# Altium PCB fullflex-2-save.PcbDoc
Units mm, origin at the board's own origin, x right, y up, seen from the top; angles counter-clockwise.
Board outline 23.88 x 31.13 mm, 4 copper layers (CuNiAu Pads, metal3, metal2, metal1), stack 0.638 mm thick; 52 components, 23 nets, 175 pads, 139 vias.
Unrouted connection lines stored in the file: 7.
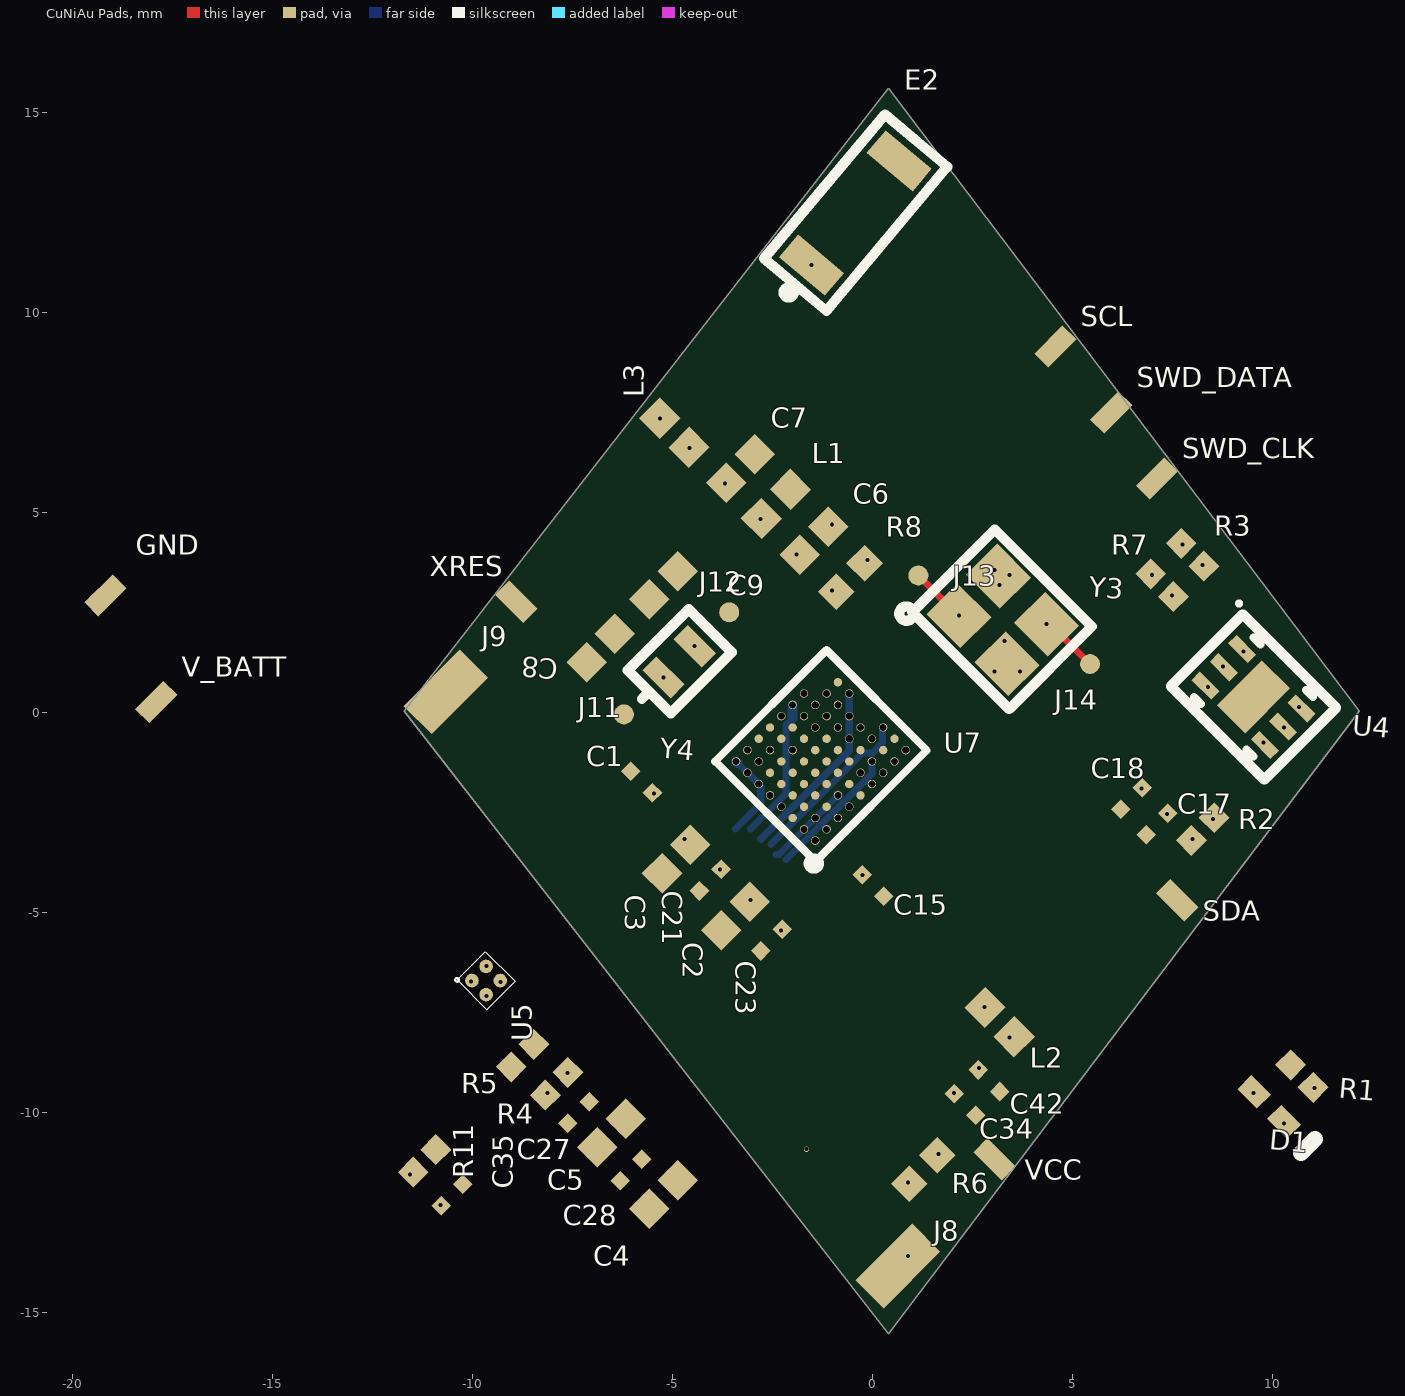
[diagram p0: CuNiAu Pads view]
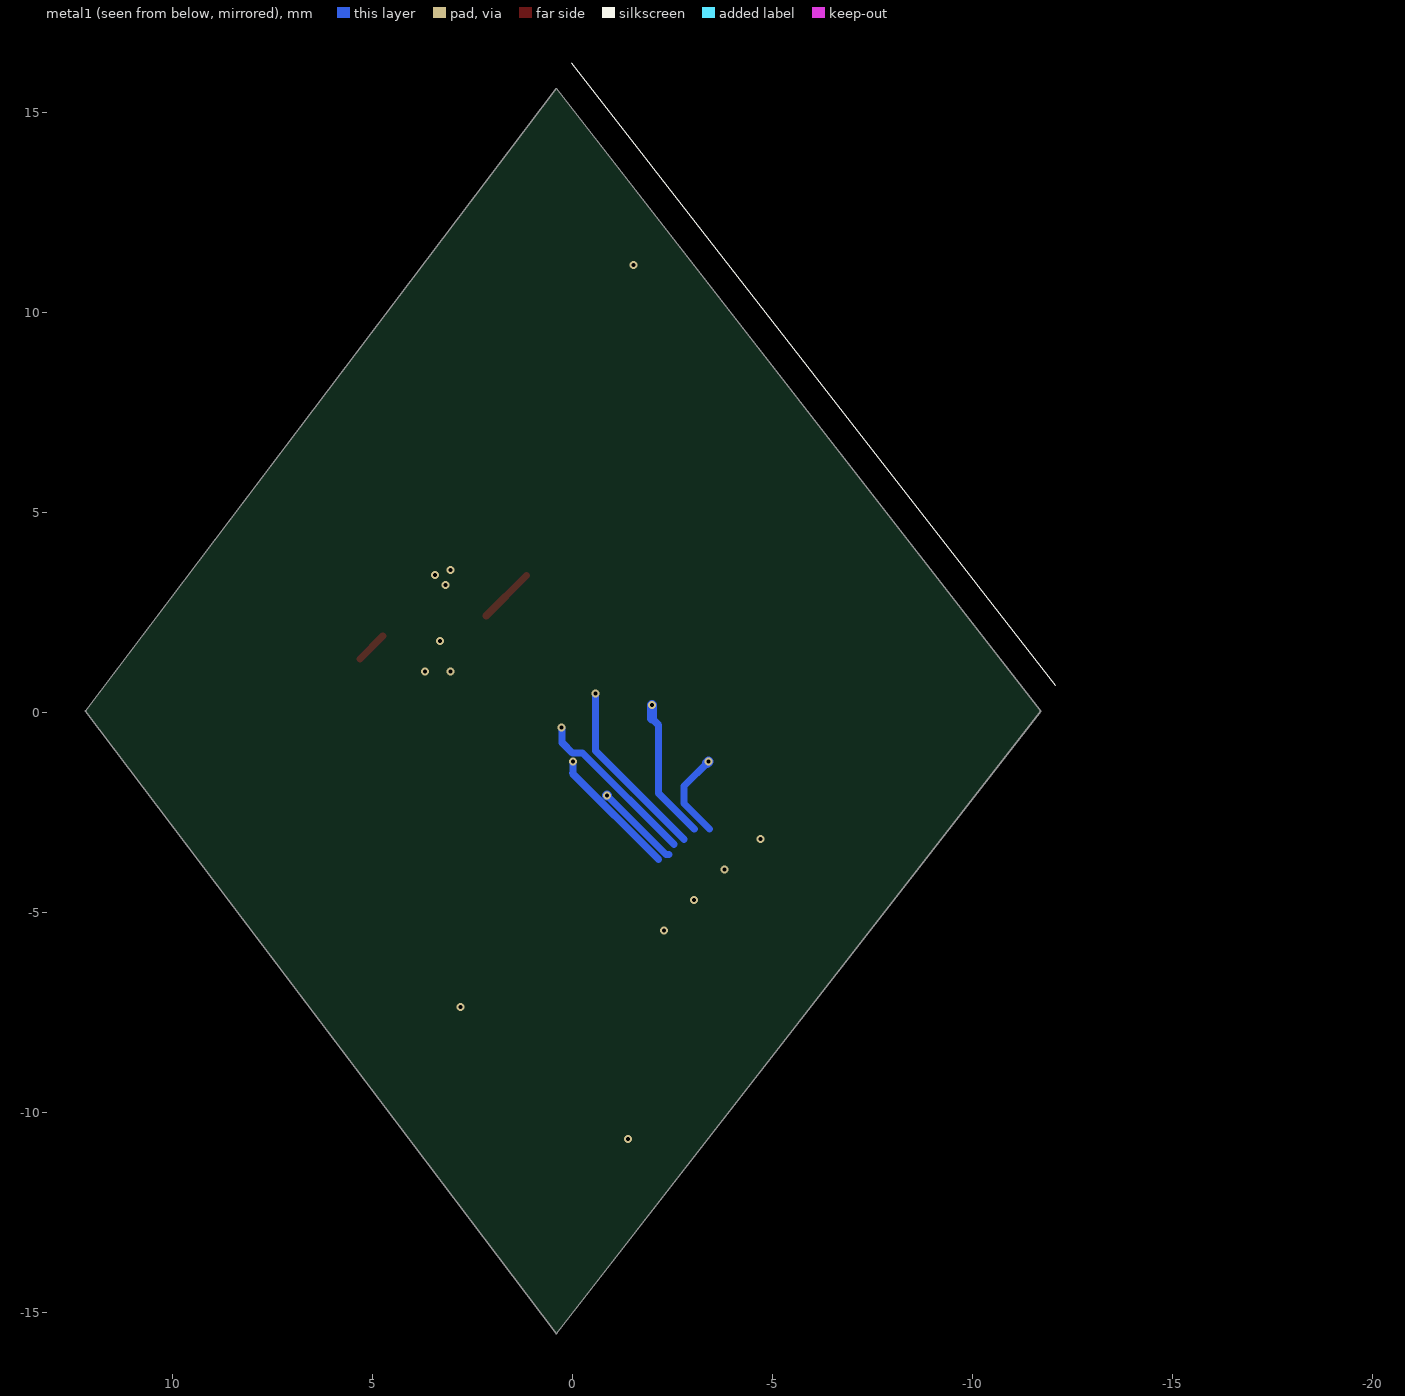
[diagram p1: metal1 view, seen from below]
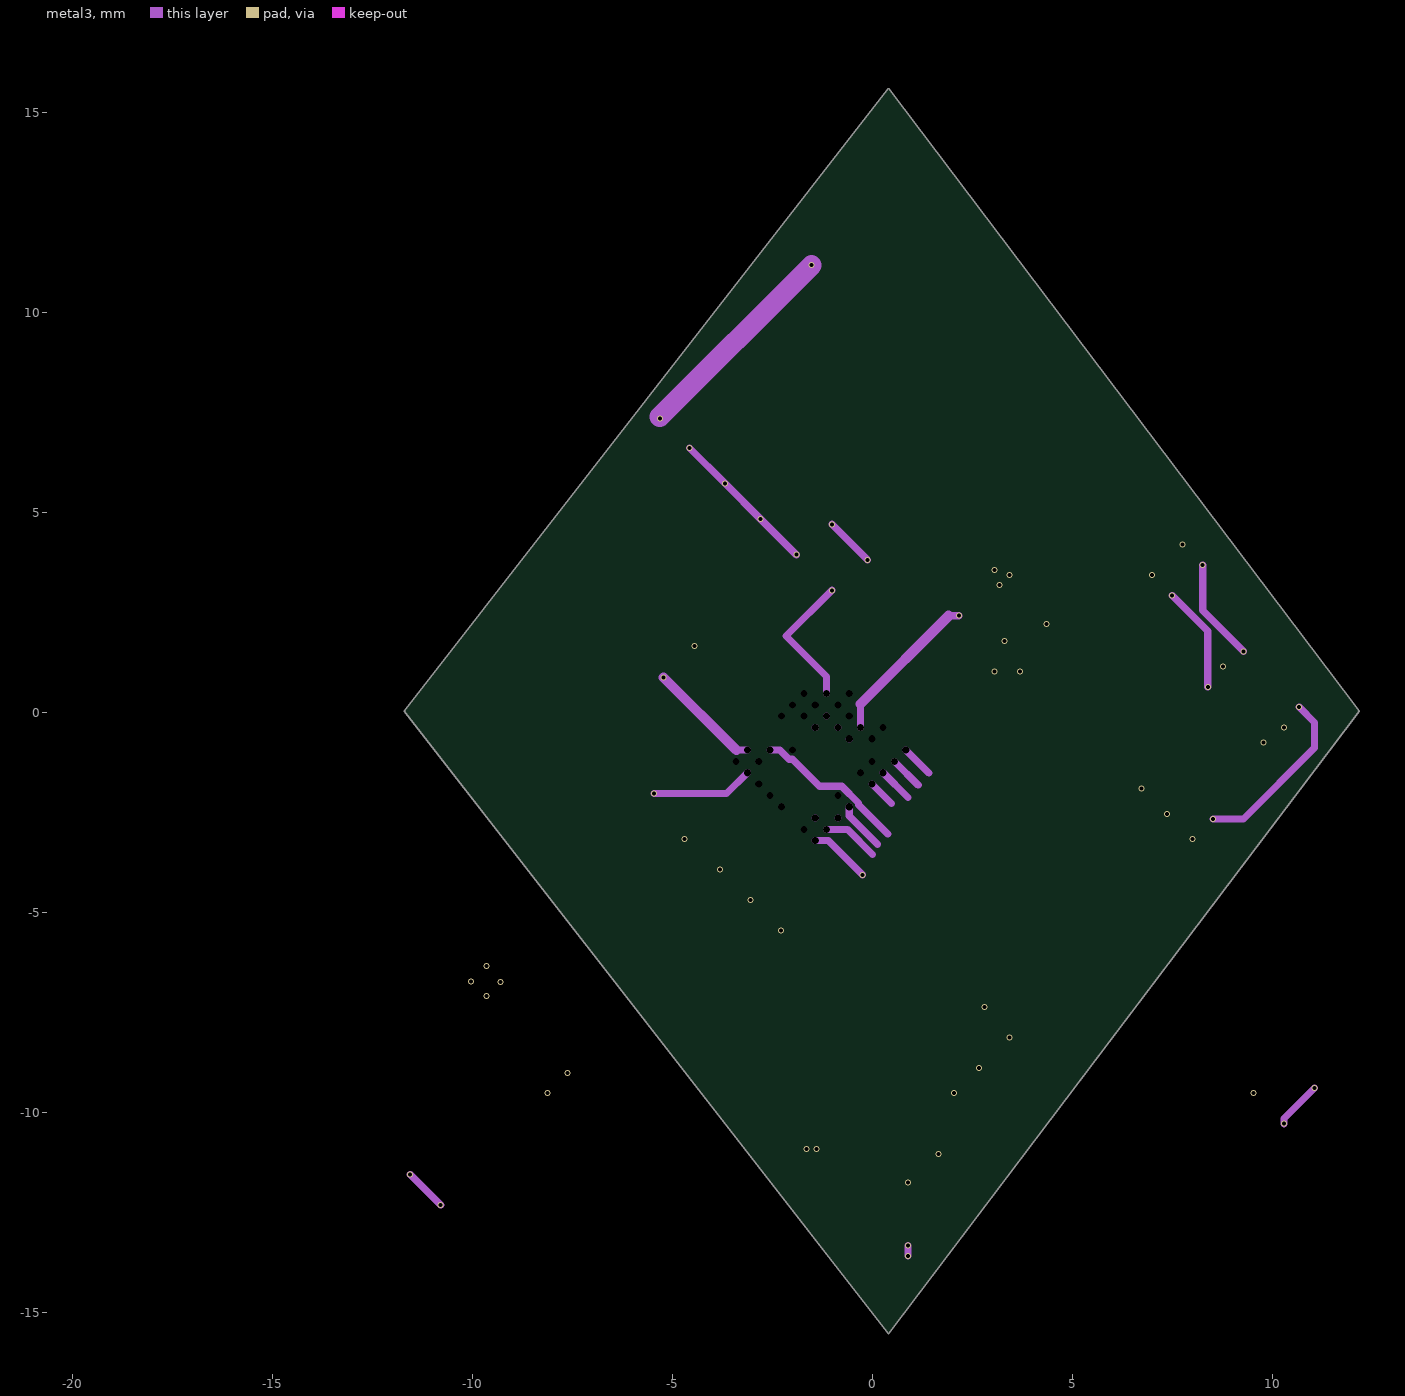
[diagram p2: metal3]
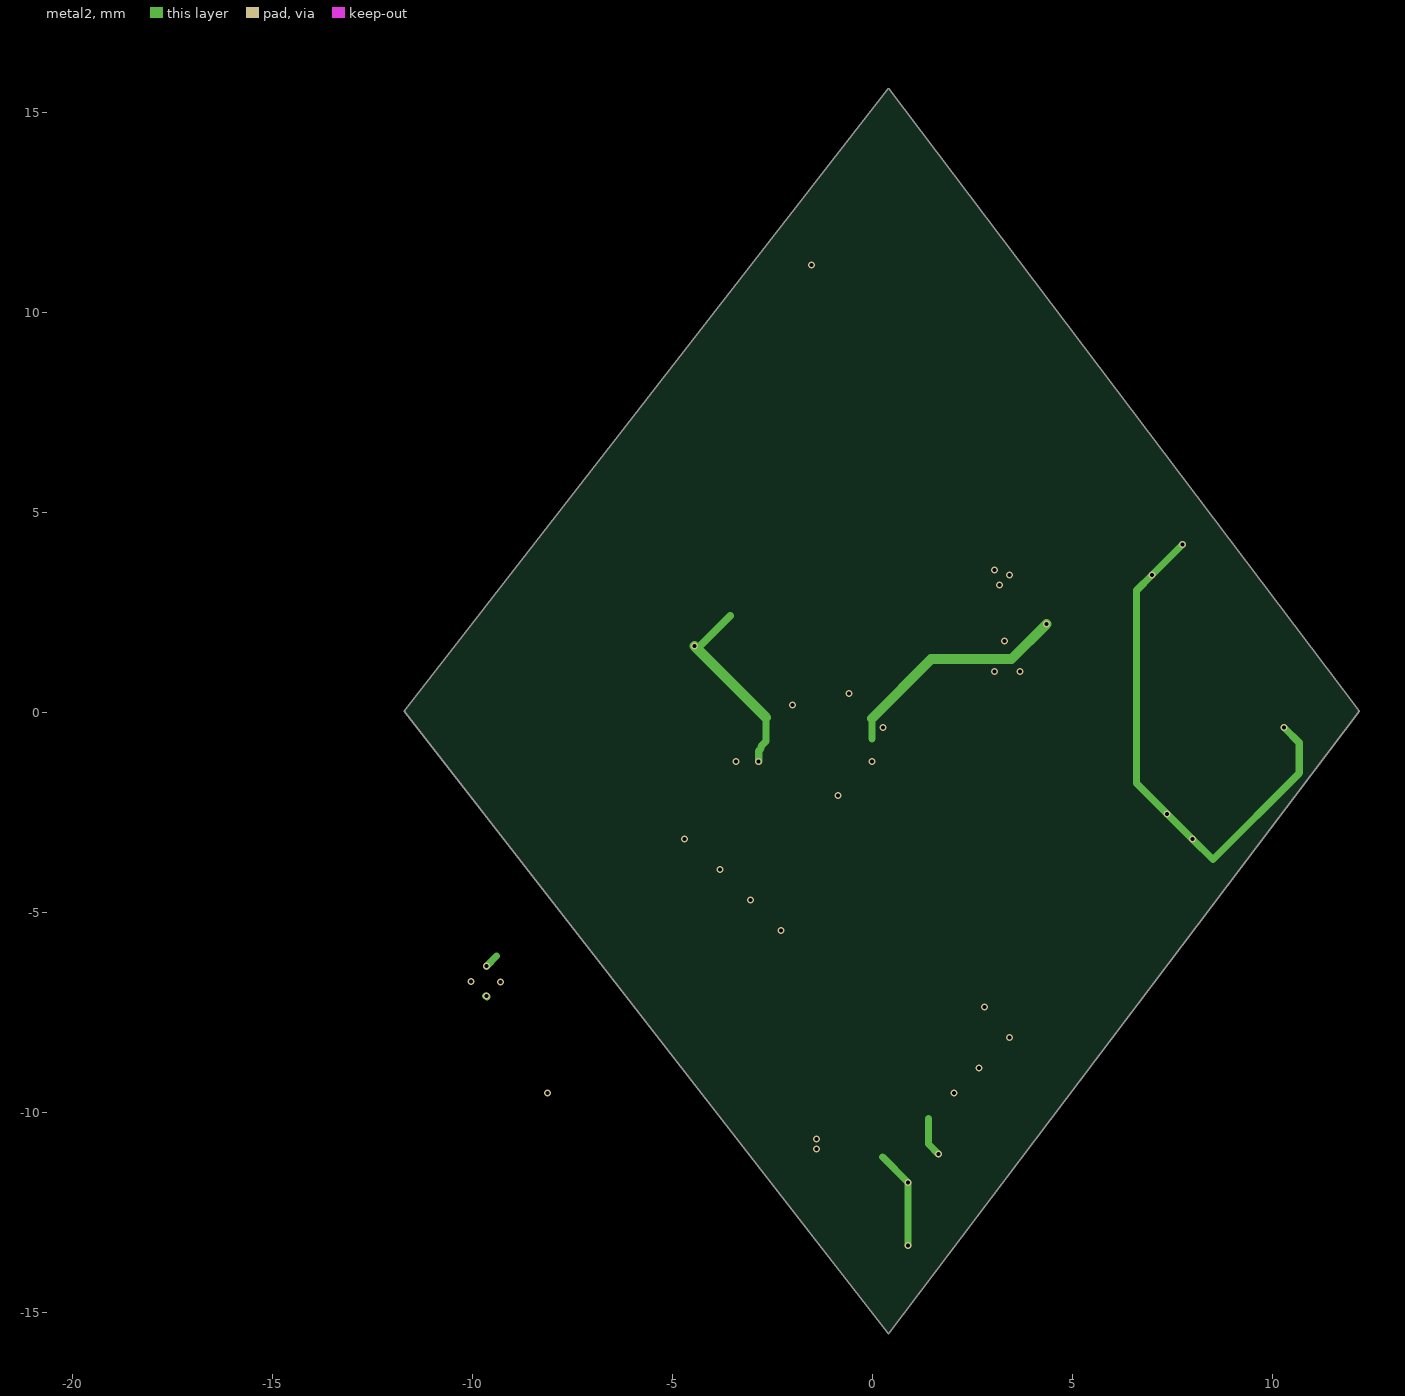
[diagram p3: metal2]

## Layer stack, top to bottom
pad expose: solder mask 0.0102, Solder Resist, Dk 3.5
CuNiAu Pads: signal copper 0.0009
pi4: core 0.254, polyimide, Dk 3.5
metal3: signal copper 0.0008
pi3: core 0.254, polyimide, Dk 3.5
metal2: signal copper 0.0008
pi2: prepreg 0.127, poylimide, Dk 3.5
metal1: signal copper 0.0008
pi1: solder mask 0.0102, Solder Resist, Dk 3.5

## Board outline
0.393,-15.532 ccw(c0.399,-15.528) 0.404,-15.532 ccw(c0.399,-15.528) 0.404,-15.532 12.171,0.024 ccw(c12.166,0.028) 12.171,0.024 ccw(c12.166,0.028) 12.172,0.028 ccw(c12.166,0.028) 12.171,0.032 12.171,0.033 cw(c12.166,0.028) 12.171,0.032 12.171,0.033 0.404,15.589 ccw(c0.399,15.585) 0.393,15.589 -11.71,0.033 ccw(c-11.704,0.028) -11.71,0.024

## Design rules (kind name [scope] priority, off if disabled: settings)
Clearance Clearance_1 [All] p1: gap=0.051 ignorepadtopadclearanceinfootprint=TRUE
Clearance bga [WithinRoom('BGA')] p2: gap=0.474 ignorepadtopadclearanceinfootprint=TRUE
ComponentClearance ComponentClearance_1 [InComponentClass('Top Side Components') vs InComponentClass('Top Side Components')] p1: gap=0.474 collisioncheckmode=3 verticalgap=0.254 showdistances=FALSE
ComponentClearance [HasFootprint('BATTERY_PAD') vs HasFootprint('POGO-PIN-PAD')] p2: gap=0 collisioncheckmode=3 verticalgap=2540 showdistances=FALSE
ComponentClearance pogoPadClearance [HasFootprint('POGO-PIN-PAD')] p3: gap=0 collisioncheckmode=3 verticalgap=0.254 showdistances=FALSE
DiffPairsRouting [All] p1: maxlimit=0.254 minlimit=0.08 mostfreqgap=0.1 toplayer_minwidth=0.178 toplayer_maxwidth=0.381 toplayer_prefwidth=0.381 midlayer1_minwidth=0.178 midlayer1_maxwidth=0.381 midlayer1_prefwidth=0.381 midlayer2_minwidth=0.178 midlayer2_maxwidth=0.381 midlayer2_prefwidth=0.381 bottomlayer_minwidth=0.178 bottomlayer_maxwidth=0.381 bottomlayer_prefwidth=0.381 maxuncoupledlength=12.7
FanoutControl Fanout_BGA [IsBGA] p1: bgadir=Out bgaviamode=Closest fanoutstyle=BGA fanoutdirection=OutOnly viagrid=0.025 // Fanout_BGA (Default Rule)
FanoutControl Fanout_Default [All] p5: bgadir=Out bgaviamode=Centered fanoutstyle=BGA fanoutdirection=Alternating viagrid=0.025 // Fanout_Default (Default Rule)
HoleSize [All] p1: absolutevalues=TRUE maxlimit=0.54 minlimit=0.025 maxpercent=80.000 minpercent=20.000
MatchedLengths MatchLengths_xSignals_U7_Y3,Y4 [InxSignalClass('xSignals_U7_Y3,Y4_MatchLengthsClass')] p1: tolerance=2.54 checknetsindiffpair=FALSE checkdiffpairvsdiffpair=TRUE checkxsignals=TRUE checkothers=TRUE
MatchedLengths [All] p2: tolerance=25.4 checknetsindiffpair=TRUE checkdiffpairvsdiffpair=FALSE checkxsignals=FALSE checkothers=FALSE
MinimumAnnularRing [All] p1: minimumring=0
ParallelSegment [All] p1: limit=254 gap=0.254
PolygonConnect [All] p1: connectstyle=Relief reliefconductorwidth=0.254 reliefentries=4 polygonreliefangle="90 Angle" airgapwidth=0.254
RoutingLayers [All] p1: top layer_v5=FALSE mid layer 1_v5=TRUE mid layer 2_v5=TRUE bottom layer_v5=TRUE
RoutingVias [All] p1 off: holewidth=0.135 width=0.136 viastyle="Through Hole" minholewidth=0.135 minwidth=0.136 maxholewidth=0.19 maxwidth=0.201
SMDNeckDown [All] p1: percent=50.000
SolderMaskExpansion [All] p1: expansion=-0.05
ViasUnderSMD [All] p1: allowed=TRUE
Width [All] p1: maxlimit=2.5 minlimit=0.178 preferedwidth=0.203 toplayer_maxwidth=0.229 midlayer2_maxwidth=0.5 bottomlayer_maxwidth=0.5 minimp=50.000000 maximp=50.000000 favimp=50.000000 checkconnectedcopper=TRUE
24 further rules are at their usual default settings.

## Classes and differential pairs
differential pair XTAL_HF: +XTAL_HF_P -XTAL_HF_N
differential pair XTAL_LF: +XTAL_LF_P -XTAL_LF_N

## Components (designator, comment, footprint, x,y, rotation, side; value= is the part's Value field where it differs from the comment)
C1 "Capacitance" CAP_0201(0603)_M -5.771,-1.746 r135 top
C2 "Capacitance" CAP_0402(1005)_M -3.423,-5.092 r225 top
C3 "Capacitance" CAP_0402(1005)_M -4.909,-3.669 r225 top
C4 "Capacitance" CAP_0402(1005)_M -5.228,-12.057 r45 top
C5 "Capacitance" CAP_0402(1005)_M -6.524,-10.519 r45 top
C6 "Capacitance" CAP_0402(1005)_M -1.464,4.287 r225 top
C7 "Capacitance" CAP_0402(1005)_M -3.302,6.096 r45 top
C8 "Capacitance" CAP_0402(1005)_M -6.796,1.608 r225 top
C9 "Capacitance" CAP_0402(1005)_M -5.226,3.173 r45 top
C15 "Capacitance" CAP_0201(0603)_M 0.015,-4.333 r315 top
C17 "Capacitance" CAP_0201(0603)_M 7.112,-2.794 r225 top
C18 "Capacitance" CAP_0201(0603)_M 6.477,-2.159 r225 top
C21 "Capacitance" CAP_0201(0603)_M -4.056,-4.2 r225 top
C23 "Capacitance" CAP_0201(0603)_M -2.525,-5.7 r225 top
C27 "Capacitance" CAP_0201(0603)_M -7.348,-10.007 r45 top
C28 "Capacitance" CAP_0201(0603)_M -6.039,-11.44 r45 top
C34 "Capacitance" CAP_0201(0603)_M 2.313,-9.803 r315 top
C35 "Capacitance" CAP_0201(0603)_M -10.508,-12.073 r45 top
C42 "Capacitance" CAP_0201(0603)_M 2.914,-9.213 r315 top
D1 "#NAME?" LED_0402(1005) 9.9,-9.85 r315 top
E2 "2450AT18B100" 2450AT18B100 -1.524,11.176 r50 top
GND "*" POGO-PIN-PAD -19.177,2.921 r315 top
J8 "*" BATTERY_PAD 0.635,-13.843 r90 top
J9 "*" BATTERY_PAD -10.668,0.508 r90 top
J11 "*" POGO-CLOCK-PAD -6.215,-0.055 r90 top
J12 "*" POGO-CLOCK-PAD -3.582,2.498 r90 top
J13 "*" POGO-CLOCK-PAD 1.146,3.419 r90 top
J14 "*" POGO-CLOCK-PAD 5.438,1.205 r90 top
L1 "Inductance" IND_0402(1005)_M -2.413,5.207 r225 top
L2 "Inductance" IND_0402(1005)_M 3.175,-7.747 r135 top
L3 "Inductance" IND_0402(1005)_M -4.953,6.985 r135 top
R1 "Resistance" RES_0201(0603)_M 10.733,-9.098 r135 top
R2 "Resistance" RES_0201(0603)_M 8.255,-2.921 r45 top
R3 "Resistance" RES_0201(0603)_M 8.001,3.937 r315 top
R4 "Resistance" RES_0201(0603)_M -7.896,-9.288 r45 top
R5 "Resistance" RES_0201(0603)_M -8.748,-8.585 r225 top
R6 "Resistance" RES_0402(1005)_M 1.27,-11.43 r45 top
R7 "Resistance" RES_0201(0603)_M 7.239,3.175 r135 top
R8 "Resistance" RES_0402(1005)_M -0.554,3.368 r45 top
R11 "Resistance" RES_0201(0603)_M -11.199,-11.216 r225 top
SCL "*" POGO-PIN-PAD 4.572,9.144 r315 top
SDA "*" POGO-PIN-PAD 7.62,-4.699 r225 top
SWD_CLK "*" POGO-PIN-PAD 7.112,5.842 r315 top
SWD_DATA "*" POGO-PIN-PAD 5.969,7.493 r315 top
U4 "*" WSON-6 9.525,0.381 r315 top
U5 "ADP172" ADP172 -9.66,-6.708 r45 top
U7 "*" WLCSP-68 -1.289,-1.089 r135 top
V_BATT "*" POGO-PIN-PAD -17.907,0.254 r315 top
VCC "*" POGO-PIN-PAD 3.048,-11.176 r225 top
XRES "*" POGO-PIN-PAD -8.905,2.759 r45 top
Y3 "ECX-2236" ECX-2236 2.159,2.413 r315 top
Y4 "32.768KHz" ABS05 -5.224,0.872 r45 top

## Footprints (in the part's own frame and the unit in brackets; to place one, negate y for a bottom-side part, rotate by r counter-clockwise, add the part's x,y. Pads: shape width x height; smd on the part's side, far side on the other; paste and mask are expansions set on the pad)
2450AT18B100 [mm] "2.4GHz Mini Antenna SMD, 50 ohm Resistence"
  rect 0.74x1.5 smd mask+0.03: 1(0,0) 2(3.406,0)
  silkscreen extent -1.02,-1.02 4.06,1.02, body extent -0.05,-0.9 3.35,0.9, height 1.4
ABS05 [mm] "32.768 kHz CRYSTAL 12.5 PF +/-20ppm"
  rect 0.5x1 smd mask+0.1: 1(0,0) 2(1.102,0)
  silkscreen extent -0.76,-0.76 1.65,0.76, body extent -0.25,-0.5 1.35,0.5, height 0.5
ADP172 [mm] "4-Ball WLCSP, CB-4-4"
  round 0.34 smd paste+0.01 mask+0.01: A1(-0.25,0.25) A2(0.25,0.25) B1(-0.25,-0.25) B2(0.25,-0.25)
  silkscreen extent -0.55,-0.53 0.5,0.57, body extent -0.48,-0.48 0.48,0.48, height 0.69
BATTERY_PAD [mm]
  rect 1x2 smd rot 45: 1(0,0)
CAP_0201(0603)_M [mm] "Chip Capacitor, Body 0.6x0.3mm, Height 0.33mm, IPC Low Density"
  rect 0.35x0.35 smd mask+0: 1(-0.381,0) 2(0.381,0)
  body extent -0.31,-0.17 0.32,0.16, height 0.33
CAP_0402(1005)_M [mm] "Chip Capacitor, Body 1.0x0.5mm, Height 0.6mm, IPC Low Density"
  rect 0.72x0.72 smd: 1(-0.5,0) 2(0.5,0)
  body extent -0.55,-0.3 0.55,0.3, height 0.6
ECX-2236 [mm] "48 MHz CRYSTAL 2.5X2.0mm"
  rect 1.2x1.1 smd mask+0.05: 1(0,0) 2(1.7,0) 4(0,1.4)
  rect 1.2x1.1 smd paste+0 mask+0.05: 3(1.7,1.4)
  silkscreen extent -1.14,-1.07 2.54,2.16, body extent -0.36,-0.24 2.14,1.76, height 0.8
IND_0402(1005)_M [mm] "Chip Inductor, 2-Leads, Body 1.1x0.6mm, IPC Low Density"
  rect 0.73x0.74 smd: 1(-0.515,0) 2(0.515,0)
  body extent -0.55,-0.3 0.55,0.3, height 0.45
LED_0402(1005) [mm] "SMD, 2-Leads, Body 1x0.5mm"
  rect 0.7x0.5 smd: A(-0.508,0) K(0.55,0)
  silkscreen extent 1.4,-0.25 1.4,0.25, body extent -0.5,-0.25 0.5,0.25, height 0.6
POGO-CLOCK-PAD [mm]
  round 0.5 smd: 1(0,0)
POGO-PIN-PAD [mm]
  rect 0.5x1 smd: 1(0,0)
RES_0201(0603)_M [mm] "Chip Resistor, Body 0.6x0.3mm, IPC Low Density"
  rect 0.55x0.55 smd: 1(-0.4,0) 2(0.4,0)
  body extent -0.31,-0.16 0.31,0.16, height 0.3
RES_0402(1005)_M [mm] "Chip Resistor, 2-Leads, Body 1.05x0.55mm, IPC Low Density"
  rect 0.65x0.65 smd: 1(-0.5,0) 2(0.5,0)
  body extent -0.53,-0.28 0.53,0.28, height 0.4
WLCSP-68 [mm] "PSOC 4 BLE CY8C4247FNI-BL483 N40P8X9_352X391X55"
  round 0.21 smd mask+0: A1(-1.4,1.6) A2(-1,1.6) A3(-0.6,1.6) A4(-0.2,1.6) A5(0.2,1.6) A6(0.6,1.6) A7(1,1.6) A8(1.4,1.6) B1(-1.4,1.2) B2(-1,1.2) B3(-0.6,1.2) B4(-0.2,1.2) B5(0.2,1.2) B6(0.6,1.2) B7(1,1.2) B8(1.4,1.2) C1(-1.4,0.8) C2(-1,0.8) C3(-0.6,0.8) C4(-0.2,0.8) C5(0.2,0.8) C6(0.6,0.8) C7(1,0.8) C8(1.4,0.8) D1(-1.4,0.4) D2(-1,0.4) D3(-0.6,0.4) D4(-0.2,0.4) D5(0.2,0.4) D6(0.6,0.4) D7(1,0.4) D8(1.4,0.4) E1(-1.4,0) E2(-1,0) E3(-0.6,0) E4(-0.2,0) E5(0.2,0) E6(0.6,0) E7(1,0) E8(1.4,0) F1(-1.4,-0.4) F2(-1,-0.4) F3(-0.6,-0.4) F4(-0.2,-0.4) F5(0.2,-0.4) F6(0.6,-0.4) F7(1,-0.4) F8(1.4,-0.4) G1(-1.4,-0.8) G2(-1,-0.8) G3(-0.6,-0.8) G4(-0.2,-0.8) G5(0.2,-0.8) G6(0.6,-0.8) G7(1,-0.8) G8(1.4,-0.8) H1(-1.4,-1.2) H2(-1,-1.2) H3(-0.6,-1.2) H4(-0.2,-1.2) H5(0.2,-1.2) H6(0.6,-1.2) H7(1,-1.2) J1(-1.4,-1.6) J2(-1,-1.6) J3(-0.6,-1.6) J6(0.6,-1.6) J7(1,-1.6)
  silkscreen extent -1.9,-1.97 1.77,2.16, body extent -1.77,-1.97 1.77,1.97, height 0.55
WSON-6 [mm] "SON, 6-Leads, Body 2x2mm, Pitch 0.65mm, Thermal Pad 1X1.6mm"
  rect 0.7x0.3 smd: 1(-1.05,0.65) 2(-1.05,0) 3(-1.05,-0.65) 4(1.05,-0.65) 5(1.05,0) 6(1.05,0.65)
  rect 1x1.6 smd: 7(0,0)
  silkscreen extent -1.95,-1.27 1.65,1.45, body extent -1,-1 1,1, height 0.8

## Part data
C1 C15 C17 C18 C21 C23 C27 C28 C34 C35 C42: library part C-0201(0603), "___ OHM ___ mW 0201(0603) SMD"
C2 C3 C4 C5 C6 C7 C8 C9: library part C-0402(1005), "___ OHM ___ mW 0402(1005) SMD"
D1: library part LED_0402(1005), "LED, 0402(1005) SMD"
E2: "2.4 GHz BLE Antenna"
GND SCL SDA SWD_CLK SWD_DATA V_BATT VCC XRES: library part "Probe-Pin Pad"
J8 J9: library part Battery_Connector
J11 J12 J13 J14: library part Probe-CLOCK
L1 L3: library part I-0402(1005)
L2: library part "Inductor Iron", "Magnetic-Core Inductor"
R1 R2 R3 R4 R5 R7 R11: library part R-0201(0603), "___ OHM ___ mW 0201(0603) SMD"
R6 R8: library part R-0402(1005), "___ OHM ___ mW 0402(1005) SMD"
U4: library part TMP116, "TI Digital I2C Temperature Sensor"
U5: "3V LDO"
U7: library part CY8C4127FNI-BL483, "PSOC 4 CYBLE"
Y3: "24 MHz Crystal"
Y4: library part ABS05, "Crystal Oscillator"

## Free pads (board coordinates)
  round 0 all layers, no hole paste+0 mask+0: 1(-6.215,-0.055) 1(-5.224,0.872) 1(-5.224,0.872) 1(-4.445,1.651) 1(-4.445,1.651) 1(-4.445,1.651) 1(-3.429,-0.127) 1(-3.232,0.07) 1(2.159,2.413) 1(4.351,2.201)

## Via types
v1: diameter 0.136/0.15 (per signal layer), hole 0.1, CuNiAu Pads to metal3, 51 vias
v2: diameter 0.136/0.15 (per signal layer), hole 0.178, CuNiAu Pads to metal3, 38 vias
v3: diameter 0.15/0.175 (per signal layer), hole 0.1, metal3 to metal2, 31 vias
v4: diameter 0.175/0.2 (per signal layer), hole 0.1, metal2 to metal1, 12 vias
v5: diameter 0.136/0.15/0.175/0.2 (per signal layer), hole 0.1, CuNiAu Pads to metal1, 7 vias

## Nets (pads, with @x,y where several pads share a name; then routed paths per layer and width w, separated by ;. In a path a pad name is that pad's centre, name@x,y a point inside that pad or via, vN(x,y) a via of type N, cw(c..) or ccw(c..) an arc to the next point about the centre after c; other vN are vias at no path point)
ALERT: R7.1 U4.3 U7.B1 | length 4.1
  metal3 w0.178: v2(-1.148,-2.927) -0.629,-2.927 0,-3.556 ; v1(7.493,2.921) 8.382,2.032 v1(8.382,0.635)
ANTENNA: R8.1 U7.H7 | length 3.5
  metal3 w0.178: v2(-1.148,0.467) -1.148,0.894 -2.159,1.905 v1(-1.016,3.048)
BATTERY_LEVEL: R4.2 R5.1 U7.A4
  other v1: -7.62,-9.017
  other v2: -2.279,-2.362
GND: C1.2 C2.2 C3.2 C4.2 C5.2 C7.2 C8.2 C9.2 C15.2 C17.2 C18.2 C21.2 C23.2 C27.2 C28.2 C34.2 C35.2 C42.2 GND.1 J9.1 L1.1 R1.2 R5.2 U4.2 U4.4 U4.7 U5.B2 U7.A2 U7.A5 U7.A6 U7.B2 U7.C1 U7.D6 U7.E8 U7.F1 U7.F6 U7.F7 U7.G4 U7.G5 U7.G6 U7.G7 U7.G8 U7.H5 U7.H6 Y3.2 Y3.4 | length 0.7
  metal3 w0.178: v2(-0.016,-1.796) 0.474,-2.286
  other v1: -9.301,-6.743 9.779,-0.762 8.763,1.143
  other v2: -1.713,-2.927 -1.43,-2.645 -0.865,-2.645 -2.562,-2.079 -2.845,-1.796 -1.996,-0.948 -0.582,-0.665 -1.43,-0.382 -0.865,-0.382 -2.279,-0.099 -1.713,-0.099 -1.148,-0.099 -0.582,-0.099 -1.43,0.184 -0.865,0.184 -1.713,0.467
  other v3: -9.301,-6.743
  other v5: 3.048,1.016 3.683,1.016 3.302,1.778 3.175,3.175 3.429,3.429 3.048,3.556
LED_RED: D1.A U7.D1 | length 1.2
  metal3 w0.178: v2(-0.582,-2.362) -0.582,-2.593 0.127,-3.302
  other v1: 9.525,-9.525
NetC6_1: C6.1 R8.2 | length 1.3
  metal3 w0.178: v1(-1.016,4.699) v1(-0.127,3.81)
NetC6_2: C6.2 C7.1 L1.2 L3.1 | length 3.8
  metal3 w0.178: v1(-4.572,6.604) v1(-3.683,5.715) v1(-2.794,4.826) v1(-1.905,3.937)
NetC34_1: C34.1 C42.1 L2.1 R6.2 U5.A2 | length 1.4
  metal2 w0.178: v3(-9.652,-6.35) -9.398,-6.096 ; 1.397,-10.16 1.397,-10.795 v1(1.651,-11.049)
  other v1: 2.032,-9.525 2.667,-8.89 3.429,-8.128 -9.652,-6.35
  other v3: 1.651,-11.049 2.032,-9.525 2.667,-8.89 3.429,-8.128
NetD1_K: D1.K R1.1 | length 1.2
  metal3 w0.178: v1(10.287,-10.287) 10.287,-10.16 v1(11.049,-9.398)
NetE2_1: E2.1 L3.2 | length 5.4
  metal3 w0.178: v1(-5.317,7.349) v1@-5.317,7.383
  metal3 w0.508: v1@-5.317,7.383 v5(-1.524,11.176)
SCL: R3.2 SCL.1 U4.1 U7.H1 | length 3.4
  metal3 w0.178: v2(0.549,-1.23) 1.143,-1.824 ; v1(8.255,3.683) 8.255,2.54 v1(9.271,1.524)
SDA: R2.2 SDA.1 U4.6 U7.J1 | length 5.3
  metal3 w0.178: v2(0.832,-0.948) 1.409,-1.524 ; v1(8.509,-2.667) 9.271,-2.667 11.049,-0.889 11.049,-0.254 v1(10.668,0.127)
SWD_CLK: SWD_CLK.1 U7.F2
  other v2: -0.299,-1.513
SWD_DATA: SWD_DATA.1 U7.G1 | length 0.9
  metal3 w0.178: v2(0.267,-1.513) 0.889,-2.136
V_BATT: C4.1 C5.1 C27.1 C28.1 J8.1 R4.1 R6.1 U5.A1 U5.B1 V_BATT.1 | length 2.8
  metal3 w0.178: v1(0.889,-13.589) v3(0.889,-13.335)
  metal2 w0.178: v3@-9.668,-7.096 v3(-9.654,-7.096) v3@-9.639,-7.112 ; 0.254,-11.121 v3(0.889,-11.756) v3(0.889,-13.335)
  other v1: 0.889,-11.756 -8.128,-9.525 -9.654,-7.096 -10.033,-6.731
  other v3: -8.128,-9.525 -10.033,-6.731
VCC: C2.1 C3.1 C17.1 C18.1 C21.1 C23.1 L2.2 R2.1 R3.1 R7.2 R11.1 U4.5 U7.A8 U7.D2 U7.F8 U7.G2 U7.J3 U7.J6 VCC.1 | length 33.6
  metal2 w0.178: v3(7.747,4.191) v3(6.985,3.429) 6.604,3.048 6.604,-1.778 v3(7.366,-2.54) v3(8.001,-3.175) 8.509,-3.683 10.668,-1.524 10.668,-0.762 v3(10.287,-0.381)
  metal1 w0.178: -3.429,-2.921 -2.794,-2.286 -2.794,-1.847 v2(-3.41,-1.23) ; -3.048,-2.921 -2.159,-2.032 -2.159,-0.326 -1.996,-0.163 ; -2.794,-3.175 -0.582,-0.963 v2(-0.582,0.467) ; -2.54,-3.302 -0.254,-1.016 0,-1.016 0.254,-0.762 0.254,-0.395 v2(0.267,-0.382) ; -2.413,-3.556 -2.342,-3.556 v2(-0.865,-2.079) ; -2.159,-3.683 0,-1.524 -0.016,-1.508 v2(-0.016,-1.23)
  metal1 w0.25: v2(-3.41,-1.23) v4@-3.371,-1.27 ; -1.996,-0.163 v2(-1.996,0.184)
  other v1: 2.794,-7.366 -2.286,-5.461 -3.048,-4.699 -3.81,-3.937 -4.699,-3.175 8.001,-3.175 7.366,-2.54 6.731,-1.905 10.287,-0.381 6.985,3.429 7.747,4.191
  other v3: 2.794,-7.366 -2.286,-5.461 -3.048,-4.699 -3.81,-3.937 -4.699,-3.175 -0.865,-2.079 -3.41,-1.23 -0.016,-1.23 0.267,-0.382 -1.996,0.184 -0.582,0.467
  other v4: 2.794,-7.366 -2.286,-5.461 -3.048,-4.699 -3.81,-3.937 -4.699,-3.175 -0.865,-2.079 -3.41,-1.23 -0.016,-1.23 0.267,-0.382 -1.996,0.184 -0.582,0.467
VCCD: C1.1 U7.A7 | length 2.5
  metal3 w0.178: v1(-5.461,-2.032) -3.646,-2.032 v2(-3.128,-1.513)
VREF: C15.1 U7.A1 | length 1.5
  metal3 w0.178: v2(-1.43,-3.21) -1.108,-3.21 v1(-0.254,-4.064)
XRES: C35.1 R11.2 U7.C7 XRES.1 | length 4.9
  metal3 w0.178: v1(-11.557,-11.557) v1(-10.795,-12.319) ; v2(-2.562,-0.948) -2.32,-0.948 -2.091,-1.176 -1.999,-1.176 -1.325,-1.85 -0.77,-1.85 -0.353,-2.267 -0.353,-2.314 0.381,-3.048
XTAL_HF_N: J14.1 pad.1@4.351,2.201 U7.H3 Y3.3 | length 6.7
  CuNiAu Pads w0.178: Y3.3@4.738,1.905 J14.1@5.311,1.332
  metal2 w0.178: v2(-0.016,-0.665) -0.016,-0.155
  metal2 w0.25: -0.016,-0.155 1.467,1.327 3.478,1.327 v3(4.351,2.201)
  other v1: 4.351,2.201
XTAL_HF_P: J13.1 pad.1@2.159,2.413 U7.H4 Y3.1 | length 5.4
  CuNiAu Pads w0.178: J13.1 2.153,2.413 v1(2.159,2.413)
  metal3 w0.178: v2(-0.299,-0.382) -0.299,0.209 ; 1.905,2.413 v1(2.159,2.413)
  metal3 w0.25: -0.299,0.209 1.905,2.413
XTAL_LF_N: C9.1 J12.1 pad.1@-3.232,0.07 pad.1@-4.445,1.651 U7.B7 Y4.2 | length 4.9
  metal2 w0.178: v1(-4.445,1.651) -4.318,1.651 -3.556,2.413 ; v3(-2.845,-1.23) -2.845,-0.965 -2.791,-0.911 -2.791,-0.853 -2.667,-0.729 -2.667,-0.127
  metal2 w0.25: v1(-4.445,1.651) -2.667,-0.127
  other v2: -2.845,-1.23
  other v3: -4.445,1.651
XTAL_LF_P: C8.1 J11.1 pad.1@-3.429,-0.127 pad.1@-5.224,0.872 pad.1@-6.215,-0.055 U7.B8 Y4.1 | length 2.9
  metal3 w0.178: -3.405,-0.948 v2(-3.128,-0.948)
  metal3 w0.25: v1(-5.224,0.872) -3.405,-0.948
pads on no net: E2.2 U7.A3 U7.B3 U7.B4 U7.B5 U7.B6 U7.C2 U7.C3 U7.C4 U7.C5 U7.C6 U7.C8 U7.D3 U7.D4 U7.D5 U7.D7 U7.D8 U7.E1 U7.E2 U7.E3 U7.E4 U7.E5 U7.E6 U7.E7 U7.F3 U7.F4 U7.F5 U7.G3 U7.H2 U7.J2 U7.J7
copper on no net:
  other v1: -1.651,-10.922
  other v3: -1.397,-10.922
  other v4: -1.397,-10.668

## Silkscreen, mask and mechanical layers (free items; w line width, h text height)
Bottom Overlay:
  lines w0.013: -12.085,0.663 0.018,16.22
Mechanical 1:
  lines w0.013: -13.496,0.236 2.06,-11.531 -13.496,0.236 ; -12.085,0.663 0.018,16.22 -12.085,0.663